# Altium PCB PCB (STM32F103C8T6).PcbDoc
Units mm, origin at the board's own origin, x right, y up, seen from the top; angles counter-clockwise.
Board outline 50 x 50 mm, 2 copper layers (Top Layer, Bottom Layer); 42 components, 36 nets, 156 pads, 0 vias.
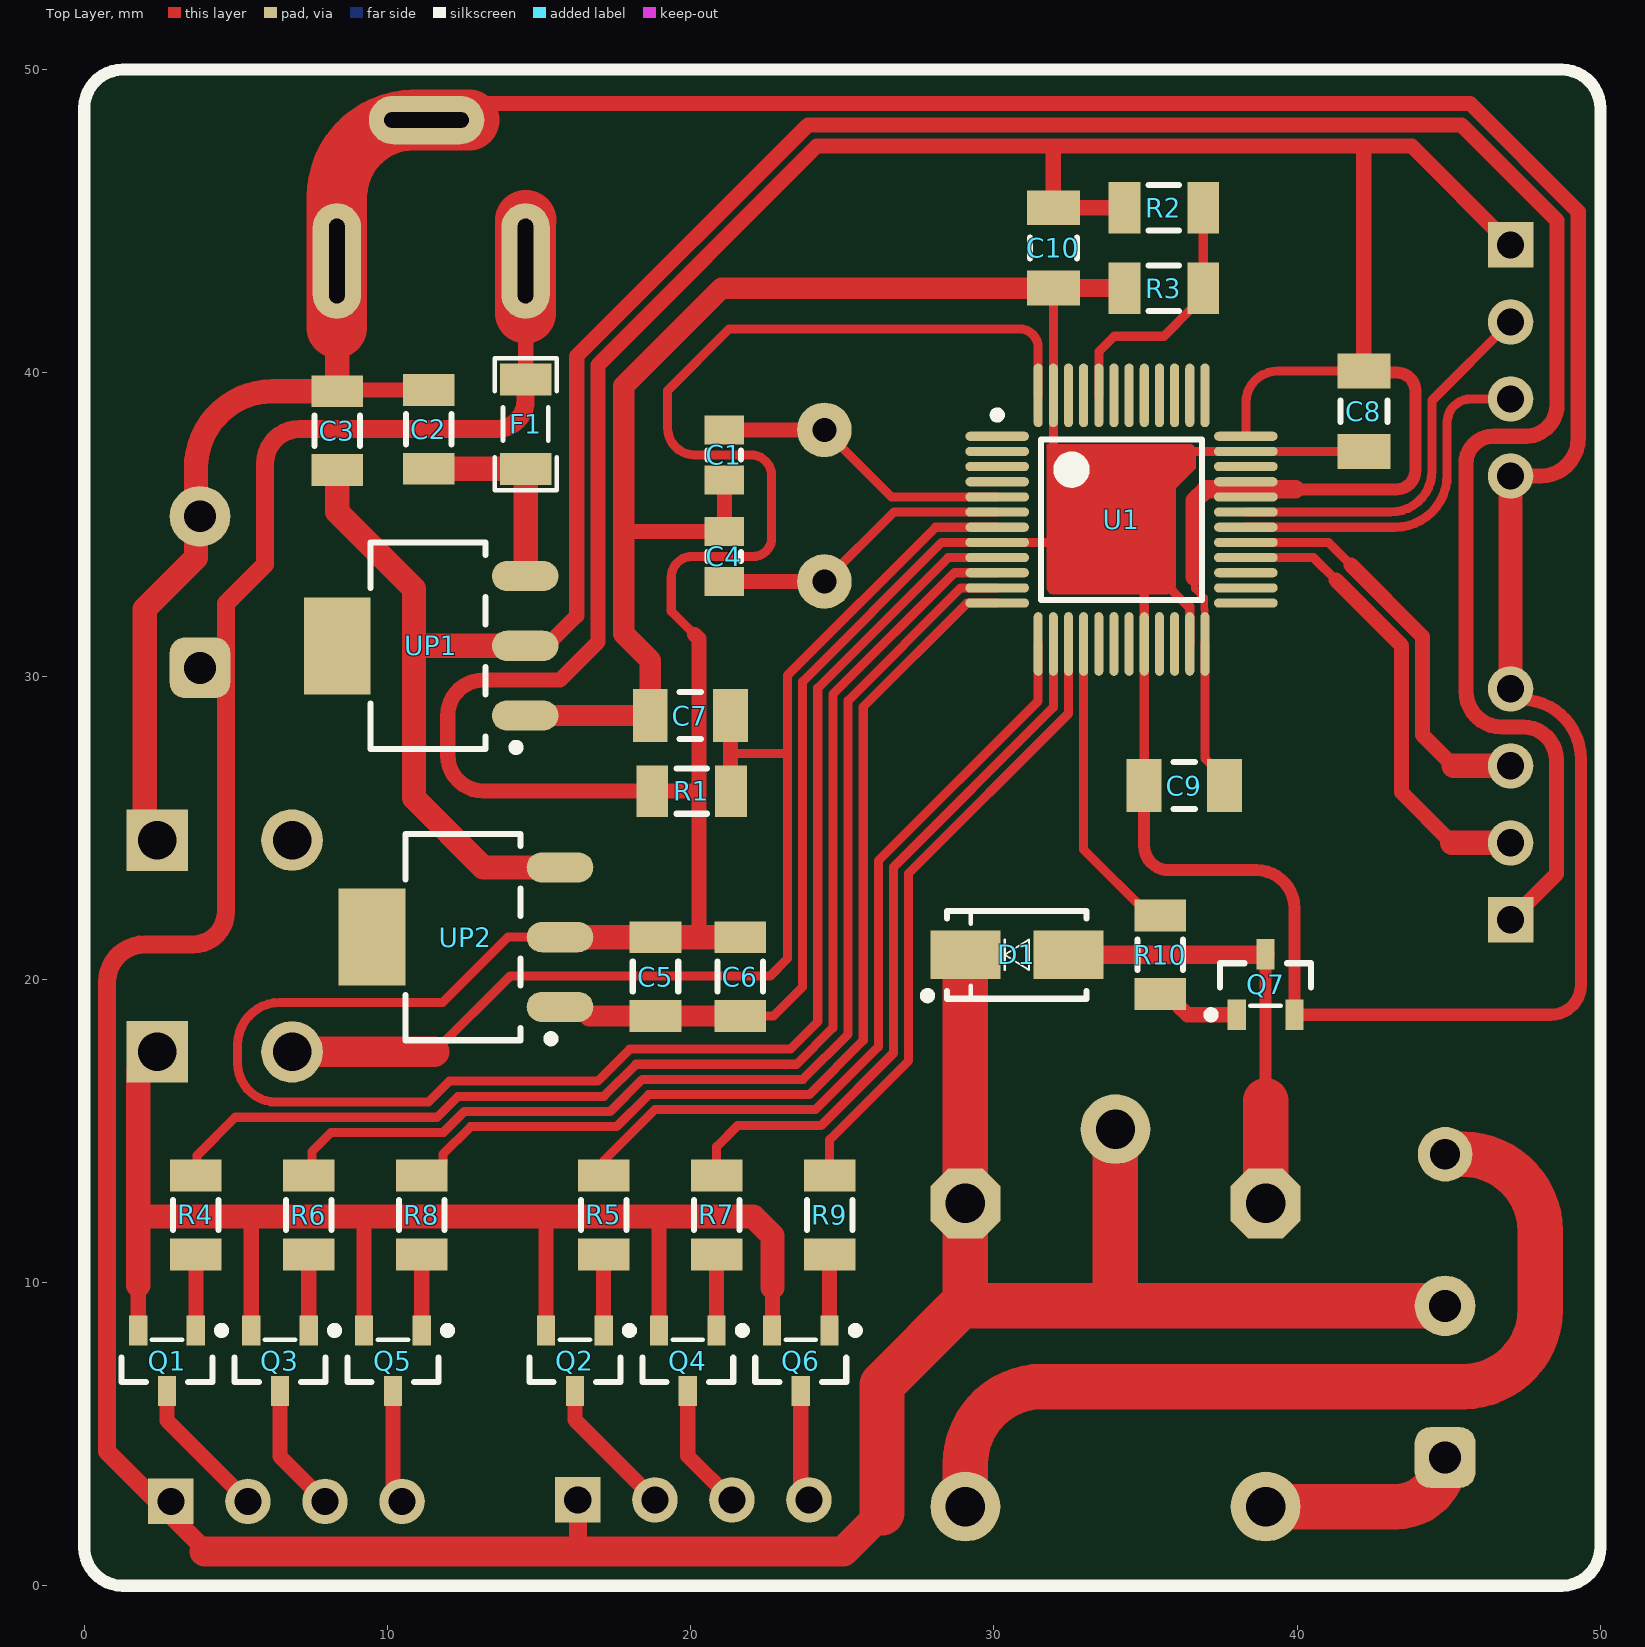
[diagram p0: Top Layer view]
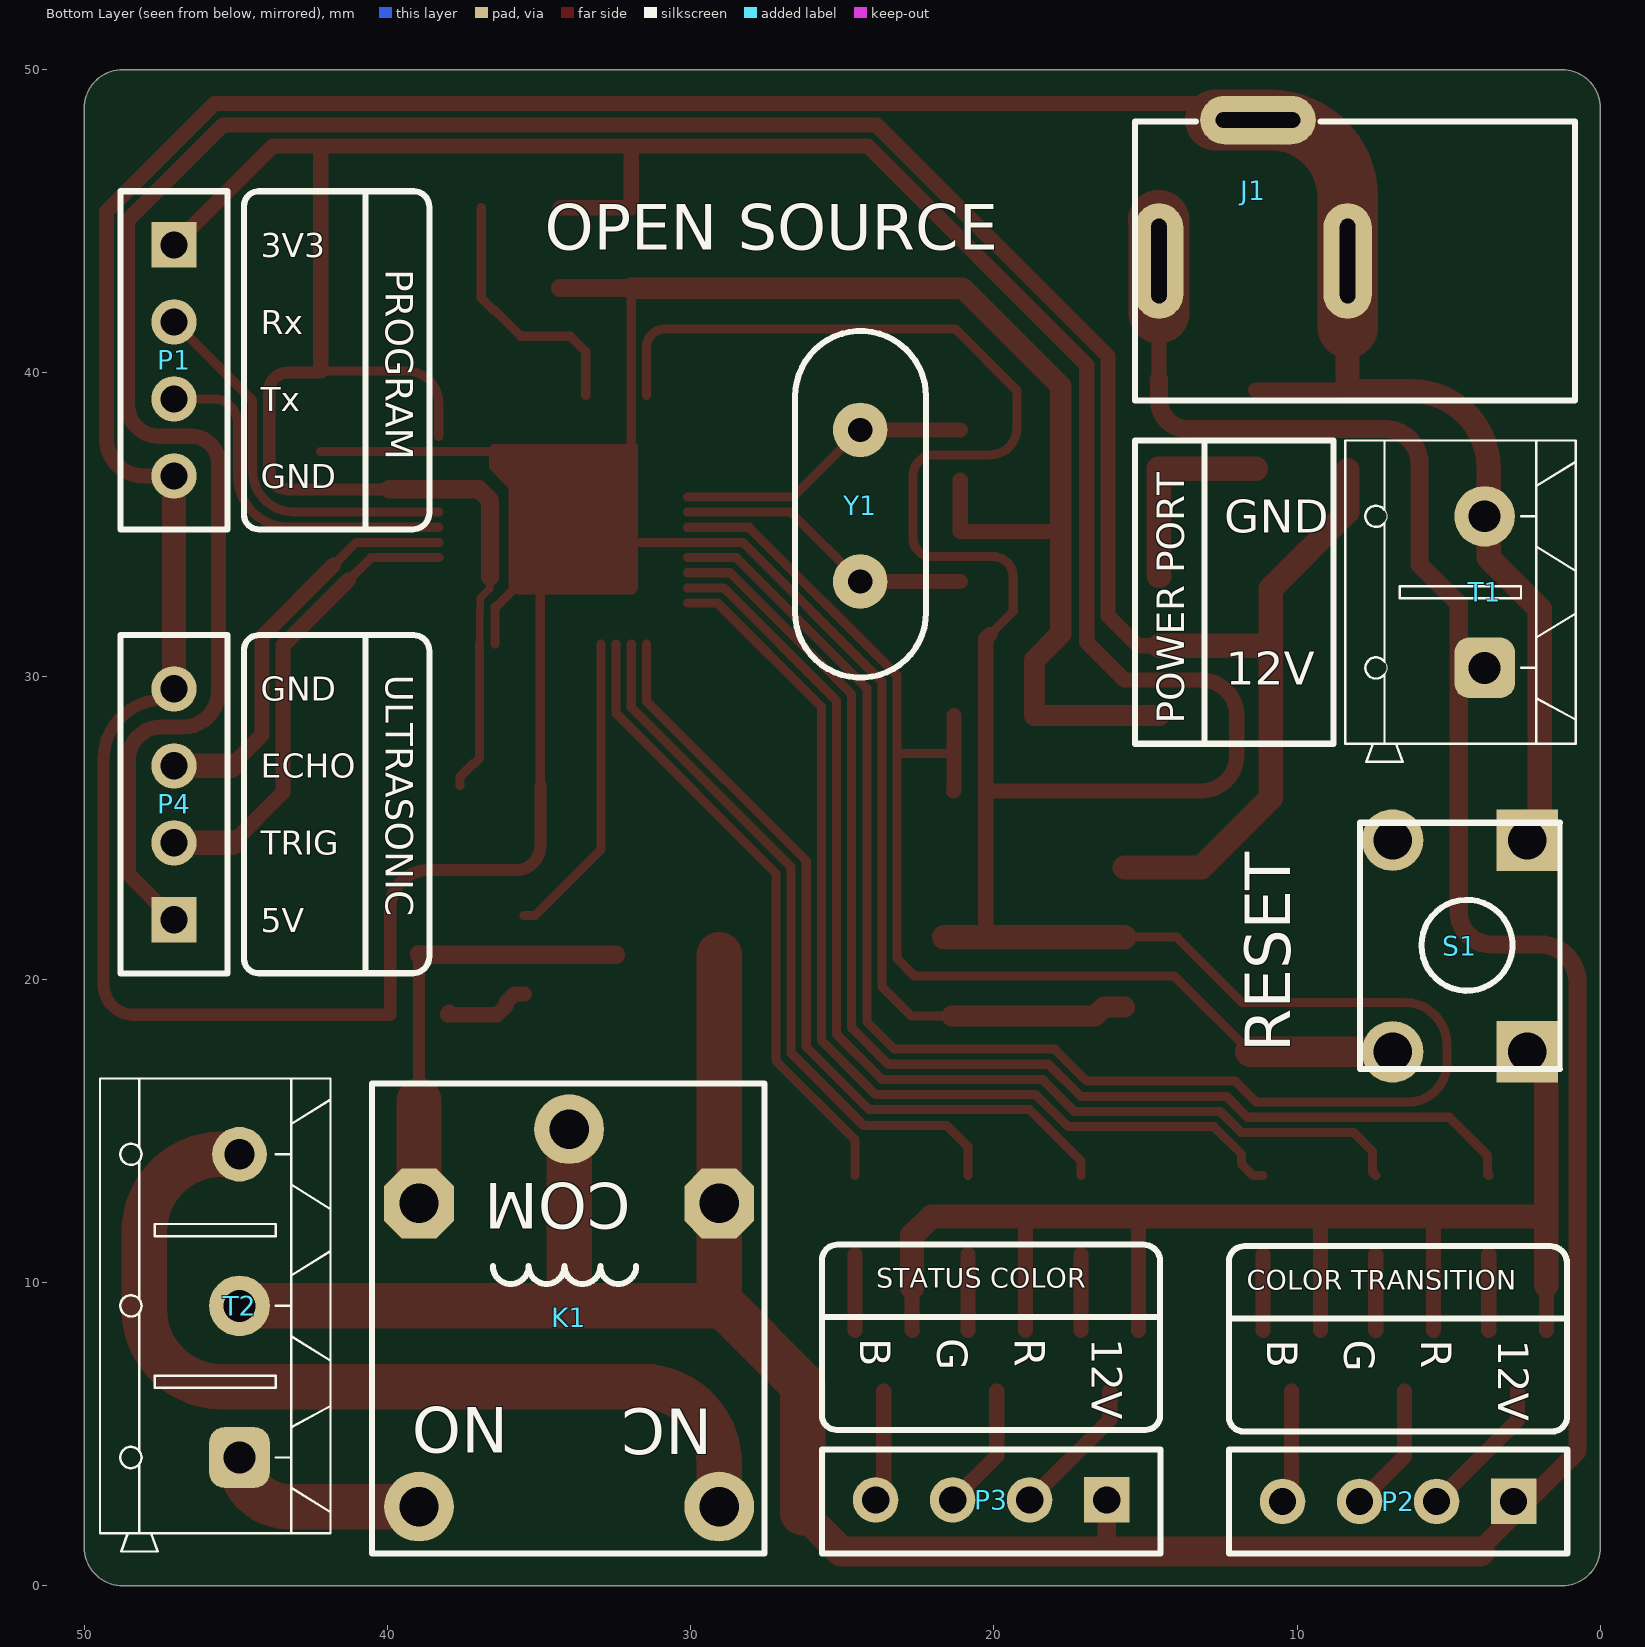
[diagram p1: Bottom Layer view, seen from below]
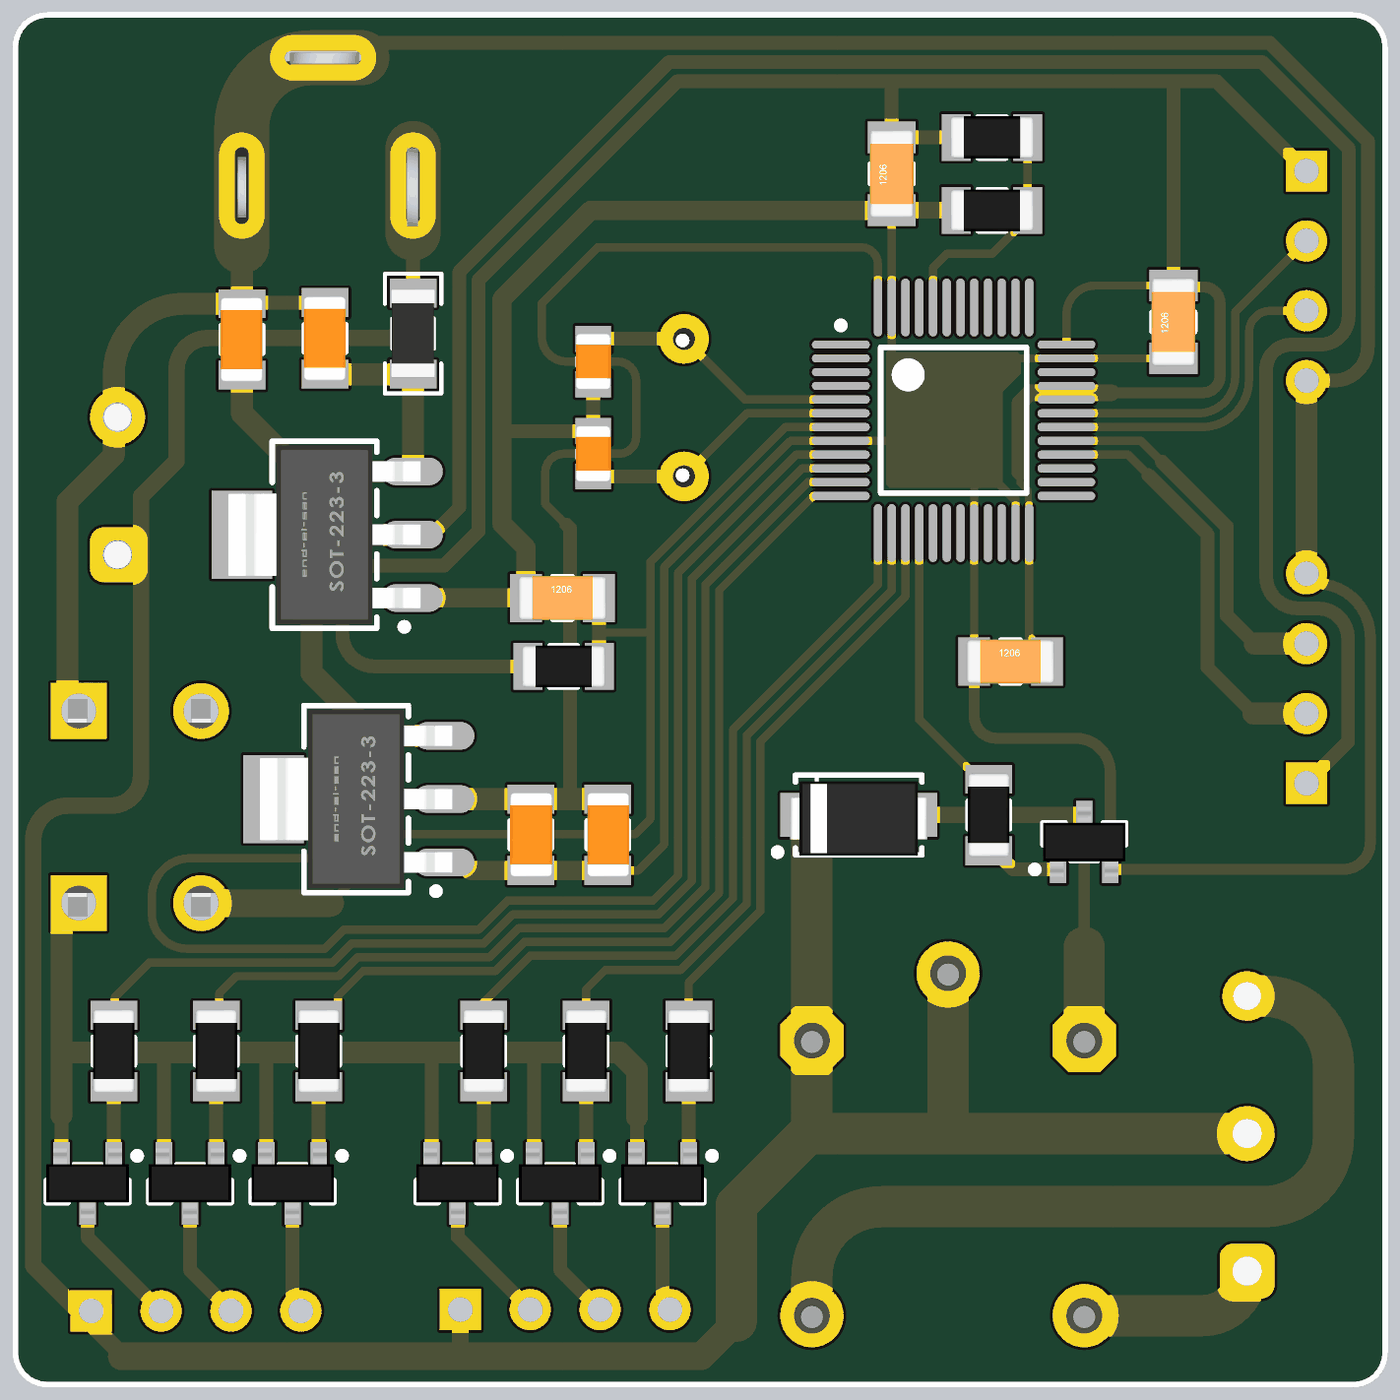
[diagram p2: 3D render of the assembled board from above, using the file's embedded part models]
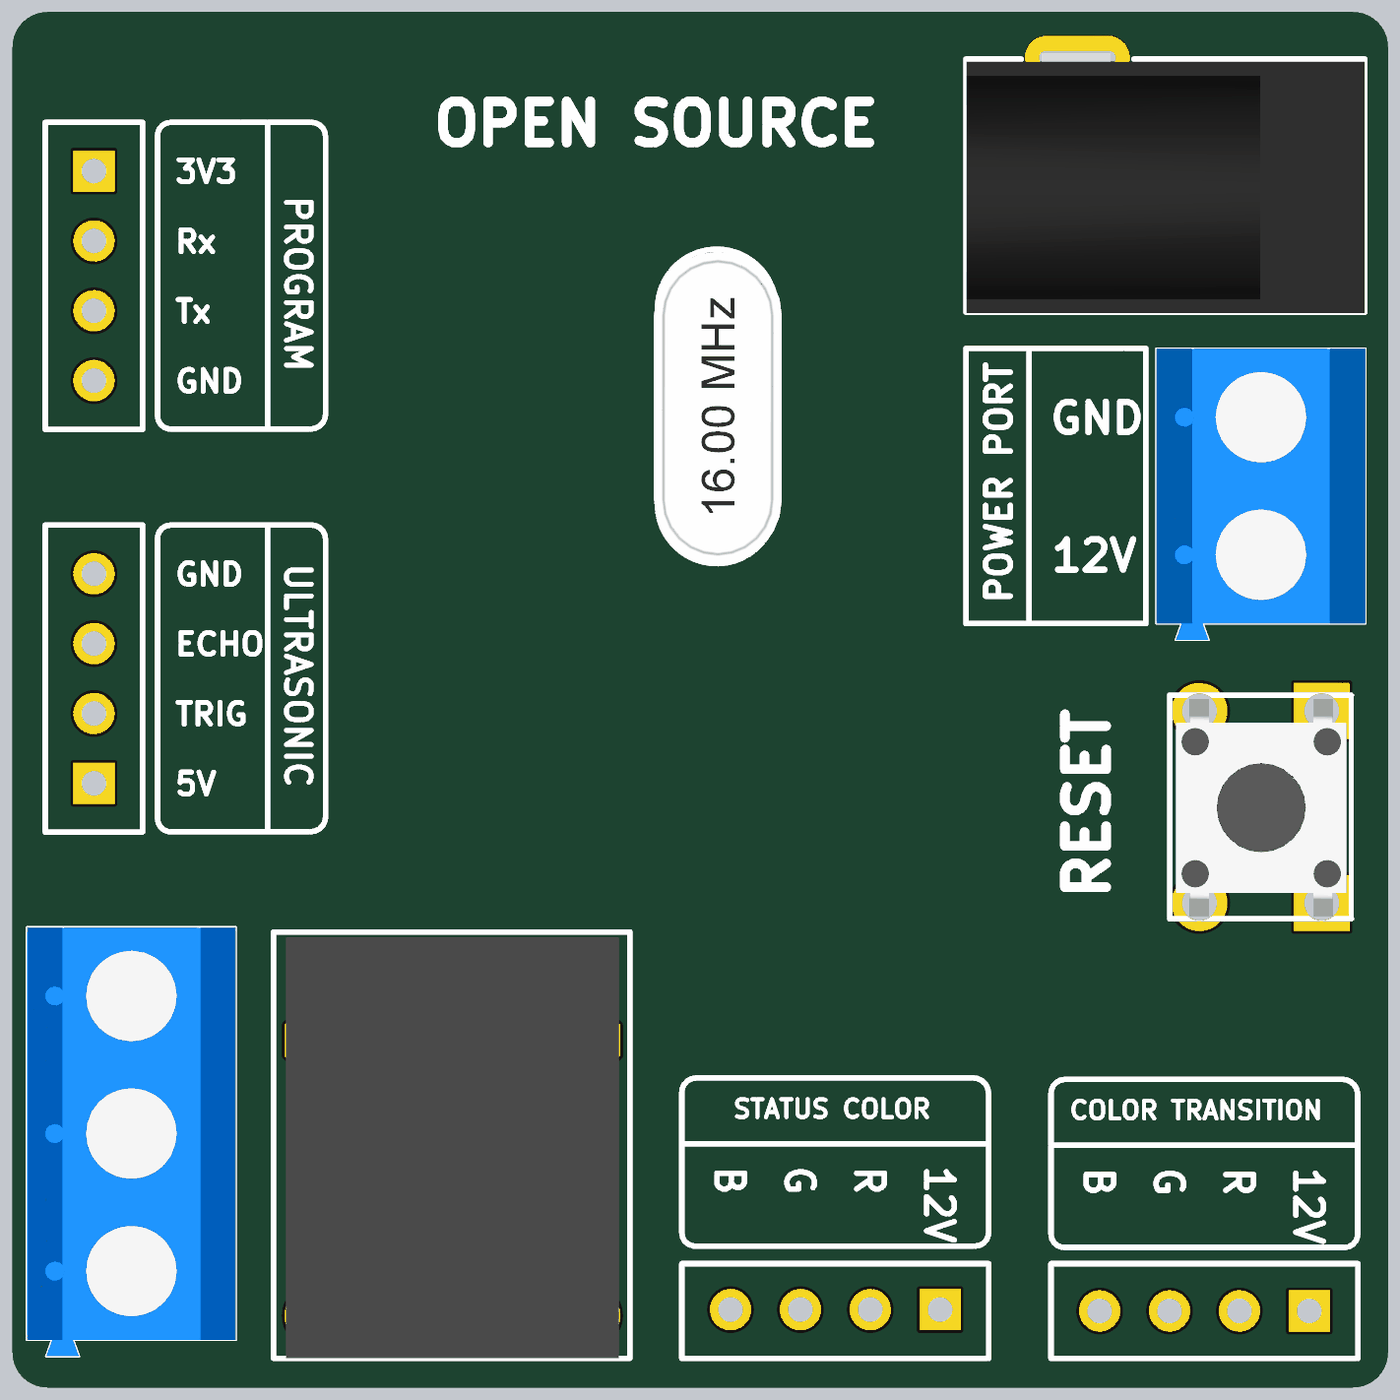
[diagram p3: 3D render of the assembled board from below, using the file's embedded part models]

## Layer stack, top to bottom
Top Solder: solder mask 0.0102, Solder Resist, Dk 3.5
Top Layer: signal copper 0.0356
Dielectric 1: dielectric 0.32, FR-4, Dk 4.8
Bottom Layer: signal copper 0.0356
Bottom Solder: solder mask 0.0102, Solder Resist, Dk 3.5

## Board outline
0,1.27 ccw(c1.27,1.27) 1.27,0 48.73,0 ccw(c48.73,1.27) 50,1.27 50,48.73 ccw(c48.73,48.73) 48.73,50 1.27,50 ccw(c1.27,48.73) 0,48.73

## Design rules (kind name [scope] priority, off if disabled: settings)
AssemblyTestPointUsage [All] p1 off:
AssemblyTestpoint [All] p1 off: testpointundercomponent=TRUE minsize=1.016 maxsize=2.54 preferedsize=1.524 minholesize=0 maxholesize=1.016 preferedholesize=0.813 testpointgrid=0.025 usegrid=TRUE gridtolerance=0 allowsidetop=TRUE allowsidebottom=TRUE
Clearance [All] p1: gap=0.254 ignorepadtopadclearanceinfootprint=FALSE except(0: Arc-Hole Track-Hole SMDPad-Hole THPad-Hole Via-Hole Fill-Hole Poly-Hole Region-Hole Text-Hole; 0.2: Arc-Arc Arc-Track Arc-SMDPad Arc-THPad Track-Track Track-SMDPad Track-THPad SMDPad-SMDPad SMDPad-THPad THPad-THPad)
FabricationTestPointUsage [All] p1 off: valid=0 allowmultiple=FALSE
FabricationTestpoint [All] p1 off: side=3 testpointundercomponent=TRUE minsize=1.016 maxsize=2.54 preferedsize=1.524 minholesize=0 maxholesize=1.016 preferedholesize=0.813 testpointgrid=0.025 allowsidetop=TRUE allowsidebottom=TRUE usegrid=TRUE gridtolerance=0
HoleSize [All] p1: absolutevalues=TRUE maxlimit=5 minlimit=0.025 maxpercent=80.000 minpercent=20.000
MinimumSolderMaskSliver [All] p1: minsoldermaskwidth=0.1
PolygonConnect [All] p1: connectstyle=Relief reliefconductorwidth=0.254 reliefentries=4 polygonreliefangle="90 Angle" airgapwidth=0.254
RoutingCorners [All] p1: cornerstyle=45-Degree minsetback=3 maxsetback=5
RoutingLayers [All] p1: top layer_v5=TRUE bottom layer_v5=FALSE
RoutingVias [All] p1: holewidth=1 width=1.5 viastyle="Through Hole" minholewidth=0.5 minwidth=1 maxholewidth=0.7 maxwidth=1.2
SilkToSilkClearance [All] p1: silktosilkclearance=0.1
SilkToSolderMaskClearance [IsPad] p1: minsilkscreentomaskgap=0 clearancetoexposedcopper=TRUE
SolderMaskExpansion [All] p1: expansion=0.102
Width [All] p1: maxlimit=3 minlimit=0.2 preferedwidth=0.5
20 further rules are at their usual default settings.

## Components (designator, comment, footprint, x,y, rotation, side; value= is the part's Value field where it differs from the comment)
C1 "18pF" CAP805 21.11,38.12 r270 top
C2 "10uF" Cap1206_(3216X15) 11.363,39.436 r270 top
C3 "10uF" Cap1206_(3216X15) 8.34,39.396 r270 top
C4 "18pF" CAP805 21.11,33.12 r90 top
C5 "10uF" Cap1206_(3216X15) 18.84,18.794 r90 top
C6 "100nF" Cap1206_(3216X15) 21.64,18.794 r90 top
C7 "100nF" Cap1206_(3216X15L) 19.99,28.7 r0 top
C8 "100nF" Cap1206_(3216X15L) 42.2,38.735 r90 top
C9 "100nF" Cap1206_(3216X15L) 36.28,26.39 r0 top
C10 "100nF" Cap1206_(3216X15L) 31.96,44.12 r90 top
D1 "1n4007" DIOM4629X24N 30.76,20.81 r180 top
F1 "Ferrite Bead SMD" FB1206 14.56,38.31 r90 top
J1 "Power Jack" "DC Power Jack" 14.554,43.69 r0 bottom
K1 "Standard Relay" "BABY Milon Relay (15.40x12.10x13.10)" 34.01,15.06 r0 bottom
P1 "Program CN" HDR1X4 47.04,44.22 r270 bottom
P2 "Show LED CN" HDR1X4 2.86,2.78 r0 bottom
P3 "Status LED CN" HDR1X4 16.28,2.83 r0 bottom
P4 "Ultrasonic CN" HDR1X4 47.04,21.96 r90 bottom
Q1 "BC846" SOT23_L 2.73,7.42 r270 top
Q2 "BC846" SOT23_L 16.18,7.42 r270 top
Q3 "BC846" SOT23_L 6.455,7.42 r270 top
Q4 "BC846" SOT23_L 19.905,7.42 r270 top
Q5 "BC846" SOT23_L 10.18,7.42 r270 top
Q6 "BC846" SOT23_L 23.63,7.42 r270 top
Q7 "BC846" SOT23_L 38.96,19.83 r90 top
R1 "10K" "RES1206 _(3216X08L)" 21.33,26.21 r180 top
R2 "10K" "RES1206 _(3216X08L)" 36.906,45.445 r180 top
R3 "10K" "RES1206 _(3216X08L)" 34.31,42.795 r0 top
R4 "330R" "RES1206 _(3216X08L)" 3.68,13.526 r270 top
R5 "330R" "RES1206 _(3216X08L)" 17.13,13.526 r270 top
R6 "330R" "RES1206 _(3216X08L)" 7.405,13.526 r270 top
R7 "330R" "RES1206 _(3216X08L)" 20.855,13.526 r270 top
R8 "330R" "RES1206 _(3216X08L)" 11.13,13.526 r270 top
R9 "330R" "RES1206 _(3216X08L)" 24.58,13.526 r270 top
R10 "330R" "RES1206 _(3216X08L)" 35.49,22.108 r270 top
S1 "Switch PB" "Switch - Push to On" 4.63,21.1 r270 bottom
T1 "Power" "KF301 2PIN" 3.817,32.77 r90 bottom
T2 "KF301_Terminal" "KF301 3PIN" 44.88,9.23 r90 bottom
U1 "STM32F103C8T6" STM-LQFP48_M 34.21,35.16 r0 top
UP1 "AMS1117" SOT223 11.34,31 r180 top
UP2 "AMS1117" SOT223 12.49,21.39 r180 top
Y1 "12 MHz" "XTAL 16MHZ" 24.41,35.62 r90 bottom

## Footprints (in the part's own frame and the unit in brackets; to place one, negate y for a bottom-side part, rotate by r counter-clockwise, add the part's x,y. Pads: shape width x height; smd on the part's side, far side on the other; paste and mask are expansions set on the pad)
"BABY Milon Relay (15.40x12.10x13.10)" [mm]
  round 2.3 hole 1.3: 1(0,0) 2(-4.95,12.45) 3(4.95,12.45)
  oct 2.3x2.3 hole 1.3: 4(-4.95,2.45) 5(4.95,2.45)
  silkscreen extent -6.45,-1.5 6.5,14, body extent -6.05,-1.3 6.05,14, height 16.1
CAP805 [mm]
  rect 0.95x1.3 smd: 1(0,0) 2(1.65,0)
  silkscreen extent 0.67,-0.55 0.97,0.55, body extent -0.19,-0.63 1.84,0.63, height 0.65
Cap1206_(3216X15) [mm]
  rect 1.05x1.7 smd: 1(0,0) 2(2.596,0)
  silkscreen extent 0.8,-0.75 1.8,0.75, body extent -0.22,-0.77 2.82,0.75, height 0.75
Cap1206_(3216X15L) [mm] "Chip Capacitor, 2-Leads, Body 3.2x1.6mm, IPC High Density"
  rect 1.15x1.75 smd: 1(-1.325,0) 2(1.325,0)
  silkscreen extent -0.35,-0.77 0.35,0.77, body extent -1.6,-0.8 1.6,0.8, height 1
"DC Power Jack" [mm]
  oval 1.6x3.81 hole 0.508 slot 2.794 at 90 deg mask+0.025: 1(0,0) 2(-6.222,0)
  oval 3.81x1.6 hole 0.508 slot 2.794 at 0 deg mask+0.025: 3(-3.264,-4.65)
  silkscreen extent -13.71,-4.6 0.79,4.6, body extent -13.71,-4.84 0.77,4.64, height 2.9
DIOM4629X24N [mm] "Molded Diode, 2-Leads, Body 4/60x2/90mm, IPC Medium Density-Design:Abbas Basereh"
  rect 2.3x1.6 smd: 1(-1.7,0) 2(1.7,0)
  silkscreen extent -2.3,-1.45 3.07,1.47, body extent -2.5,-1.22 2.5,1.48, height 2.2
FB1206 [mm] "Ferrite Chip Bead SMD 1206-Design:Ali Hafizi"
  rect 1.05x1.7 smd: 1(-1.475,0) 2(1.475,0)
  silkscreen extent -2.17,-1.02 2.18,1.02, body extent -1.59,-0.8 1.61,0.8, height 1.1
HDR1X4 [mm] "Connector; Header; 4 Position"
  rect 1.5x1.5 hole 0.9: 1(0,0)
  round 1.5 hole 0.9: 2(2.54,0) 3(5.08,0) 4(7.62,0)
  silkscreen extent -1.77,-1.77 9.39,1.77
"KF301 2PIN" [mm] "Designer Abbas Basereh"
  rrect50% 2x2 hole 1.05: 1(-2.5,0)
  round 2 hole 1.05: 2(2.5,0)
  silkscreen extent -5.6,-3 5,4.6, body extent -5.6,-3 5,4.6, height 10
"KF301 3PIN" [mm] "Designer Abbas Basereh"
  rrect50% 2x2 hole 1.05: 1(-5,0)
  round 2 hole 1.05: 2(0,0)
  round 1.8 hole 1: 3(5,0)
  silkscreen extent -8.1,-3 7.5,4.6, body extent -8.1,-3 7.5,4.6, height 10
"RES1206 _(3216X08L)" [mm] "Chip Resistor, 2-Leads, Body 3.2x1.6mm, IPC High Density _ (0.125 W)"
  rect 1.05x1.7 smd: 1(0,0) 2(2.596,0)
  silkscreen extent 0.8,-0.75 1.8,0.75, body extent -0.23,-0.76 2.82,0.76, height 0.6
SOT23_L [mm] "SOT23, 3-Leads, Body 2.9x1.3mm, Pitch 0.95mm, Lead Span 2.3mm, IPC High Density"
  rect 1x0.6 smd: 1(-1,0.95) 2(-1,-0.95) 3(1,0)
  silkscreen extent -1.12,-1.5 0.7,1.93, body extent -1.27,-1.5 1.27,1.5, height 1.1
SOT223 [mm] "SOT223, 4-Leads, Body 6.5x3.5mm, Pitch 2.30mm-Designer"
  oval 2.2x1 smd: 1(-3.2,2.3) 2(-3.2,0) 3(-3.2,-2.3)
  rect 2.2x3.2 smd: 4(3,0)
  Top Layer pour cut-out: -1.7,3.556 1.7,3.556 1.7,-3.556 -1.7,-3.556
  silkscreen extent -3.03,-3.4 1.9,3.47, body extent -3.5,-3.25 3.5,3.25, height 1.7
STM-LQFP48_M [mm] "QFP, 48-Leads, Body 7x7mm, Pitch 0.5mm, IPC Low Density"
  oval 2.1x0.3 smd: 1(-4.1,2.75) 2(-4.1,2.25) 3(-4.1,1.75) 4(-4.1,1.25) 5(-4.1,0.75) 6(-4.1,0.25) 7(-4.1,-0.25) 8(-4.1,-0.75) 9(-4.1,-1.25) 10(-4.1,-1.75) 11(-4.1,-2.25) 12(-4.1,-2.75) 25(4.1,-2.75) 26(4.1,-2.25) 27(4.1,-1.75) 28(4.1,-1.25) 29(4.1,-0.75) 30(4.1,-0.25) 31(4.1,0.25) 32(4.1,0.75) 33(4.1,1.25) 34(4.1,1.75) 35(4.1,2.25) 36(4.1,2.75)
  oval 0.3x2.1 smd: 13(-2.75,-4.1) 14(-2.25,-4.1) 15(-1.75,-4.1) 16(-1.25,-4.1) 17(-0.75,-4.1) 18(-0.25,-4.1) 19(0.25,-4.1) 20(0.75,-4.1) 21(1.25,-4.1) 22(1.75,-4.1) 23(2.25,-4.1) 24(2.75,-4.1) 37(2.75,4.1) 38(2.25,4.1) 39(1.75,4.1) 40(1.25,4.1) 41(0.75,4.1) 42(0.25,4.1) 43(-0.25,4.1) 44(-0.75,4.1) 45(-1.25,4.1) 46(-1.75,4.1) 47(-2.25,4.1) 48(-2.75,4.1)
  silkscreen extent -4.22,-2.65 2.65,3.57, body extent -3.5,-3.5 3.5,3.5, height 1.6
"Switch - Push to On" [mil]
  rect 80x80 hole 50: 1(-137.5,87.5) 1(137.5,87.5)
  round 80 hole 50: 2(-137.5,-87.5) 2(137.5,-87.5)
  silkscreen extent -160,-130 160,130, body extent -155,-121 157,123, height 205
"XTAL 16MHZ" [mm] "Crystal Oscillator"
  round 1.8 hole 0.8: 1(-2.5,0) 2(2.5,0)
  silkscreen extent -5.67,-2.18 5.76,2.15, body extent -5.68,-2.38 5.67,2.27, height 0.99

## Part data
C1 C2 C3 C4 C5 C6 C7 C8 C9 C10: library part "CAP SMD PACKAGE", "TOTAL CAPACITOR SMD PACK", Data=2017-3-10, Desc.="CAP SMD TOTAL PACKAGES"
  C1 C4 C6 C7 C8 C9 C10: Designer="Majid Derhambakhsh"
  C2 C3 C5: Designer="Abbas Basereh"
D1: library part "1n4007 SMD M7", "Standard Rectifiers", Manufacturer="DC COMPONENTS", Data=16-12-2016, Designer="Abbas Basereh", Link=http://www.tme.eu/en/details/m7/smd-universal-diodes/dc-components/, Part. No=M7
F1: library part "Ferrite Bead SMD Package", Designer="Ali Hafizi"
J1: library part "DC Power Jack", Designer="Majid Derhambakhsh"
K1: library part Relay, "Relay SPDT POWER NEEDLE", Company=E.P.I.L, Design_Date=2011/10/31, Designer="Ali Hafizi"
P1 P2 P3 P4: library part "Header 4", "Header, 4-Pin", LatestRevisionDate=17-Jul-2002, LatestRevisionNote="Re-released for DXP Platform.", Publisher="Altium Limited"
Q1 Q2 Q3 Q4 Q5 Q6 Q7: "NPN General-purpose Transistor", ComponentLink1Description="Manufacturer Link", ComponentLink1URL=http://www.semiconductors.philips.com/, ComponentLink2Description=Datasheet, ComponentLink2URL=http://www.semiconductors.philips.com/acrobat/datasheets/BC846_BC847_BC848_5.pdf, DatasheetVersion=4-Feb-2002, LatestRevisionDate=12-Dec-2006, LatestRevisionNote="IPC-7351 Footprint Added.", PackageDescription="3-Pin SOT-23 Package 0.95 mm Pitch, 2.3 mm Lead Span", PackageReference=SOT23, PackageVersion=2017-1-6, Published=2017-1-6, Publisher="Abbas Basereh"
R1 R2 R3 R4 R5 R6 R7 R8 R9 R10: library part "RES SMD PACKAGE", "TOTAL SMD RESISTOR PACK", Data=2017-3-10, Desc.="RES SMD PAKAGES", Designer="Abbas Basereh"
S1: "Push Button Switch"
T1: library part KF301-2Pin_Terminal, "Terminal 2 Pin 250VAC 16A", Designer="Abbas Basereh", Link=https://www.aliexpress.com/item/, Part. No="KF301 2P"
T2: library part KF301-3Pin_Terminal, "Terminal 3 Pin 250VAC 16A", Designer="Abbas Basereh", Link=https://www.aliexpress.com/item/, Part. No="KF301 3P"
U1: "ARM Cortex-M3 32-bit MCU, 64 KB Flash, 20 KB Internal RAM, 37 I/Os, 48-pin LQFP, -40 to 85 degC, Tray", I/Os (High Current)=37, Operating Frequency(F) (Processor speed) (MHz)=72, Supplier Part Number 1=497-6063-ND, Supply Voltage(Vcc) min (V)=2, A/D Converter="2x12-bit (10 Channel)", ComponentLink1Description="Manufacturer URL", ComponentLink1URL=http://www.st.com/web/en/home.html, ComponentLink2Description=Datasheet, ComponentLink2URL=http://www.st.com/st-web-ui/static/active/en/resource/technical/document/datasheet/CD00161566.pdf, ComponentLink3Description="Package Specification", ComponentLink3URL=http://www.st.com/st-web-ui/static/active/en/resource/technical/document/datasheet/DM00058181.pdf, Core="ARM Cortex-M3", DatasheetVersion="Rev. 16", FLASH Size (Prog) (kB)=64, Internal RAM Size (kB)=20, Mounting Technology="Surface Mount", PackageDescription="48-Pin Low Profile Quad Flat Package, 7 x 7 mm Body, 0.5 mm Pitch", PackageReference=LQFP48, PackageVersion="Rev. 6, 06/2013", Packing=Tray, PartNumber=STM32F103C8T6, Supplier 1=Digi-Key, Supplier 2=Farnell, Supplier 3=Newark, Supplier 4=Newark, Supplier 5=Mouser, Supplier Part Number 2=1447637, Supplier Part Number 3=59M2182, Supplier Part Number 4=57P1222, Supplier Part Number 5=511-STM32F103C8T6
UP1 UP2: "x.x Volt, 800mA Low-Dropout Linear Regulator, 4-pin SOT-223", Data=16-12-2016, Designer="Ali Hafizi"
Y1: library part XTAL, "XTAL Crystal", ComponentLink1Description=Datasheet, ComponentLink2Description=Reference, Design Date=2017-1-3, Designer="ABBAS BASEREH", Mounting Technology="Surface Mount\Through-Hole", Status=Unreleased

## Nets (pads, with @x,y where several pads share a name; then routed paths per layer and width w, separated by ;. In a path a pad name is that pad's centre, name@x,y a point inside that pad or via, vN(x,y) a via of type N, cw(c..) or ccw(c..) an arc to the next point about the centre after c; other vN are vias at no path point)
3v3: C5.2 C6.2 C8.2 C9.2 C10.2 P1.1 R1.2 R2.2 U1.9 U1.24 U1.32 U1.33 U1.36 U1.48 UP2.2 | length 197.2
  Top Layer w0.25: 36.62,33.28 36.62,32.89 36.935,32.575 36.935,32.213 36.953,32.195 36.953,31.067 U1.24
  Top Layer w0.3: UP2.2 13.97,21.39 11.82,19.24 6.46,19.24 ccw(c6.46,17.84) 5.06,17.84 5.06,17.23 ccw(c6.34,17.23) 6.34,15.95 11.35,15.95 12.04,16.64 16.932,16.64 17.992,17.7 23.284,17.7 24.19,18.606 24.19,29.606 28.494,33.91 U1.9 ; 20.13,31.37 19.36,32.14 19.36,33.26 cw(c20.045,33.26) 20.045,33.945 22.065,33.945 ccw(c22.065,34.55) 22.67,34.55 22.67,36.61 ccw(c21.985,36.61) 21.985,37.295 20.13,37.295 cw(c20.13,38.185) 19.24,38.185 19.24,39.42 21.27,41.45 30.85,41.45 cw(c30.85,40.84) 31.46,40.84 U1.48 ; U1.24 36.96,27.291 37.136,27.115 37.18,27.115 37.605,26.69 C9.2 ; U1.36 38.31,39.01 cw(c39.36,39.01) 39.36,40.06 C8.2
  Top Layer w0.4: 39.95,36.16 43.28,36.16 ccw(c43.28,36.78) 43.9,36.78 43.9,39.41 ccw(c43.3,39.41) 43.3,40.01 42.25,40.01 C8.2
  Top Layer w0.5: 20.13,31.37 20.27,31.23 20.27,26.22 ; 20.27,21.39 20.27,26.22 ; R2.2 C10.2 31.96,47.43 31.91,47.48 ; C8.2 42.2,47.47 42.21,47.48 ; P1.1 43.78,47.48 42.21,47.48 ; 20.27,26.22 20.26,26.21 R1.2 13.17,26.21 cw(c13.17,27.39) 11.99,27.39 11.99,28.7 cw(c13.16,28.7) 12.033,29.013 cw(c13.16,28.7) 12.847,29.827 cw(c13.16,28.7) 13.16,29.87 15.69,29.87 16.94,31.12 16.94,40.26 24.16,47.48 31.91,47.48 ; 31.91,47.48 42.21,47.48
  Top Layer w0.6: 36.62,33.28 36.62,35.792 36.988,36.16 39.95,36.16
  Top Layer w0.8: UP2.2 C5.2 20.27,21.39 C6.2
5v: C3.2 P4.1 UP1.2 UP2.3 | length 96.6
  Top Layer w0.5: UP1.2 15.25,31 16.24,31.99 16.24,40.55 23.87,48.18 45.42,48.18 48.57,45.03 48.57,38.94 cw(c47.54,38.94) 48.428,38.418 cw(c47.54,38.94) 48.062,38.052 cw(c47.54,38.94) 47.54,37.91 46.47,37.91 ccw(c46.47,37.01) 45.57,37.01 45.57,29.5 ccw(c46.75,29.5) 46.75,28.32 47.461,28.32 cw(c47.461,27.231) 48.55,27.231 48.55,23.47 P4.1
  Top Layer w0.8: C3.2 8.34,35.41 10.872,32.878 10.872,31 ; UP1.2 10.872,31 ; UP2.3 13.16,23.69 10.872,25.978 10.872,31
BOOT0: R2.1 R3.2 U1.44 | length 8.6
  Top Layer w0.3: U1.44 33.46,40.7 33.97,41.21 35.61,41.21 36.495,42.095 36.531,42.095 36.906,42.47 R3.2 R2.1
GND: C1.2 C2.1 C3.1 C4.2 C5.1 C6.1 C7.1 C8.1 C9.1 C10.1 J1.2 J1.3 P1.4 P4.4 Q1.2 Q2.2 Q3.2 Q4.2 Q5.2 Q6.2 Q7.2 R3.1 S1.1 T1.2 U1.8 U1.20 U1.23 U1.35 U1.47 UP1.1 UP2.1 | length 259.1
  Top Layer w0.3: C6.1@21.38,18.794 C6.1 22.734,18.794 23.69,19.75 23.69,29.813 28.287,34.41 U1.8 32.03,34.41 32.03,34.52 ; 31.96,37.53 U1.47 C10.1 ; C9.1@34.96,26.39 U1.20 34.96,32.92 35.02,32.92 ; 35.91,32.8 35.88,32.83 35.88,32.82 36.41,32.29 36.46,32.29 U1.23 ; 35.92,37.41 U1.35 C8.1
  Top Layer w0.4: C9.1 34.955,24.415 ccw(c35.77,24.415) 35.77,23.6 38.66,23.6 cw(c38.66,22.35) 39.91,22.35 Q7.2 48.37,18.83 ccw(c48.37,19.82) 49.36,19.82 49.36,27.26 ccw(c47.396,27.26) 47.396,29.224 cw(c47.396,29.58) P4.4
  Top Layer w0.5: Q1.2 1.78,9.9 ; 5.45,12.18 5.505,12.125 Q3.2 ; C3.1 cw(c8.38,39.396) 8.38,39.436 C2.1 ; Q5.2 9.23,12.18 ; J1.3@12.698,48.34 13.238,48.88 45.71,48.88 49.27,45.32 49.27,37.83 cw(c48.04,37.83) 48.04,36.6 P1.4 ; Q2.2 15.23,12.18 ; 17.825,34.77 C4.2 C1.2 ; Q4.2 18.955,12.18 ; Q6.2 22.7,8.44 22.7,9.84
  Top Layer w0.6: C10.1 R3.1
  Top Layer w0.7: UP1.1 C7.1 18.665,30.525 17.795,31.395 17.795,39.565 21.025,42.795 C10.1 ; UP2.1 16.371,19.09 16.667,18.794 C5.1 C6.1@21.38,18.794
  Top Layer w0.8: 1.78,9.9 1.78,12.18 ; S1.1@2.408,17.608 1.792,16.992 1.792,16.534 1.78,16.523 1.78,12.18 ; S1.1@2.408,24.593 1.997,25.003 1.997,32.21 3.682,33.894 3.682,36.856 cw(c6.222,36.856) 6.222,39.396 C3.1 8.34,41.482 8.332,41.49 ; 22.7,9.84 22.7,11.54 22.06,12.18 18.955,12.18 15.23,12.18 9.23,12.18 5.45,12.18 1.78,12.18 ; P4.4 P1.4
  Top Layer w2: 8.332,41.49 J1.2 8.332,45.8 cw(c10.872,45.8) 10.872,48.34 J1.3 J1.3@12.698,48.34
MCU_XI: C1.1 U1.5 Y1.2 | length 9.9
  Top Layer w0.3: Y1.2 26.62,35.91 U1.5
  Top Layer w0.5: C1.1 Y1.2
MCU_XO: C4.1 U1.6 Y1.1 | length 9.9
  Top Layer w0.3: Y1.1 26.7,35.41 U1.6
  Top Layer w0.5: C4.1 Y1.1
NetC2_2: C2.2 F1.1 UP1.3 | length 6.7
  Top Layer w0.8: C2.2 11.363,36.835 F1.1 14.56,33.32 cw(c14.54,33.32) UP1.3
NetD1_1: D1.1 K1.5 Q7.3 | length 14.7
  Top Layer w0.4: 38.96,16 Q7.3@38.96,20.81
  Top Layer w0.6: D1.1 38.96,20.81 Q7.3
  Top Layer w1.5: K1.5 38.96,16
NetK1_2: K1.2 T2.3 | length 30.4
  Top Layer w1.5: K1.2 29.06,4.03 cw(c31.6,4.03) 31.6,6.57 45.48,6.57 ccw(c45.48,9.11) 46.543,6.803 ccw(c45.48,9.11) 47.787,8.047 ccw(c45.48,9.11) 48.02,9.11 48.02,11.69 ccw(c45.48,11.69) 47.795,12.735 ccw(c45.48,11.69) 46.525,14.005 ccw(c45.48,11.69) 45.48,14.23 T2.3
NetK1_3: K1.3 T2.1 | length 6.8
  Top Layer w1.5: K1.3 43.26,2.61 ccw(c43.26,4.23) T2.1
NetP2_2: P2.2 Q1.3 | length 4.7
  Top Layer w0.5: Q1.3 2.73,5.45 P2.2
NetP2_3: P2.3 Q3.3 | length 4.3
  Top Layer w0.5: Q3.3 6.455,4.265 P2.3
NetP2_4: P2.4 Q5.3 | length 3.8
  Top Layer w0.5: Q5.3 10.18,3.351 10.48,3.051 P2.4
NetP3_2: P3.2 Q2.3 | length 4.7
  Top Layer w0.5: Q2.3 16.18,5.47 P3.2
NetP3_3: P3.3 Q4.3 | length 4.2
  Top Layer w0.5: Q4.3 19.905,4.285 P3.3
NetP3_4: P3.4 Q6.3 | length 3.7
  Top Layer w0.5: Q6.3 23.63,3.371 23.9,3.101 P3.4
NetQ1_1: Q1.1 R4.2 | length 2.5
  Top Layer w0.5: Q1.1 R4.2
NetQ2_1: Q2.1 R5.2 | length 2.5
  Top Layer w0.5: Q2.1 R5.2
NetQ3_1: Q3.1 R6.2 | length 2.5
  Top Layer w0.5: Q3.1 R6.2
NetQ4_1: Q4.1 R7.2 | length 2.5
  Top Layer w0.5: Q4.1 R7.2
NetQ5_1: Q5.1 R8.2 | length 2.5
  Top Layer w0.5: Q5.1 R8.2
NetQ6_1: Q6.1 R9.2 | length 2.5
  Top Layer w0.5: Q6.1 R9.2
NetQ7_1: Q7.1 R10.2 | length 3
  Top Layer w0.5: R10.2 35.815,19.512 36.09,19.237 36.09,19.123 36.383,18.83 Q7.1 38.01,18.864 Q7.1@37.96,18.914
NRST: C7.2 R1.1 S1.2 U1.7 | length 40.1
  Top Layer w0.3: 11.548,17.608 14.05,20.11 22.62,20.11 23.19,20.68 23.19,30.02 28.08,34.91 U1.7 ; 21.315,27.444 23.054,27.444
  Top Layer w0.5: C7.2 21.315,27.444 21.315,26.225 R1.1
  Top Layer w1: S1.2@6.853,17.608 11.548,17.608
PRXD: P1.2 U1.31 | length 12.9
  Top Layer w0.3: U1.31 43.088,35.41 ccw(c43.088,36.772) 44.45,36.772 44.45,39.09 P1.2
PTXD: P1.3 U1.30 | length 11.9
  Top Layer w0.3: U1.30 43.229,34.91 ccw(c43.229,36.631) 44.95,36.631 44.95,38.37 cw(c45.72,38.37) 45.72,39.14 P1.3
RELAY: R10.1 U1.16 | length 10.2
  Top Layer w0.3: U1.16 32.96,24.28 35.132,22.108 R10.1
SHOW_LED_B: R8.1 U1.12 | length 33.4
  Top Layer w0.3: R8.1 11.455,13.526 11.83,13.901 11.83,14.226 12.744,15.14 17.553,15.14 18.613,16.2 23.906,16.2 25.69,17.984 25.69,28.984 29.116,32.41 U1.12
SHOW_LED_G: R6.1 U1.11 | length 37.6
  Top Layer w0.3: R6.1 7.515,13.636 7.515,14.325 8.14,14.95 11.847,14.95 12.537,15.64 17.346,15.64 18.406,16.7 23.699,16.7 25.19,18.191 25.19,29.192 28.908,32.91 U1.11
SHOW_LED_R: R4.1 U1.10 | length 41.5
  Top Layer w0.3: R4.1 3.72,13.566 3.72,14.19 4.98,15.45 11.64,15.45 12.33,16.14 17.139,16.14 18.199,17.2 23.492,17.2 24.69,18.398 24.69,29.399 28.701,33.41 U1.10
STAT_LED_B: R9.1 U1.15 | length 20.8
  Top Layer w0.3: R9.1 24.58,14.71 27.19,17.32 27.19,23.496 32.46,28.766 U1.15
STAT_LED_G: R7.1 U1.14 | length 23.7
  Top Layer w0.3: R7.1 20.855,14.485 21.55,15.18 24.3,15.18 26.69,17.57 26.69,23.703 31.96,28.973 U1.14
STAT_LED_R: R5.1 U1.13 | length 26.6
  Top Layer w0.3: R5.1 17.13,14.01 18.82,15.7 24.113,15.7 26.19,17.777 26.19,23.91 31.46,29.18 U1.13
USONIC_ECHO: P4.3 U1.29 | length 13.7
  Top Layer w0.3: U1.29 41.03,34.41 41.78,33.66
  Top Layer w0.5: 41.78,33.66 44.14,31.3 44.14,28.06 45.16,27.04
  Top Layer w0.8: 45.16,27.04 P4.3
USONIC_TRIG: P4.2 U1.28 | length 15.5
  Top Layer w0.3: U1.28 40.54,33.91 41.285,33.165
  Top Layer w0.5: 41.285,33.165 43.44,31.01 43.44,26.17 45.11,24.5
  Top Layer w0.8: 45.11,24.5 P4.2
VCC: D1.2 F1.2 J1.1 K1.1 K1.4 P2.1 P3.1 T1.1 T2.2 | length 123
  Top Layer w0.5: F1.2 J1.1@14.56,41.97
  Top Layer w0.6: T1.1 T1.1@4.672,30.27 ; 3.97,1.13 3.97,1.21 0.75,4.43 0.75,19.9 cw(c2,19.9) 2,21.15 3.59,21.15 ccw(c3.59,22.232) 4.672,22.232 T1.1@4.672,30.27 ; F1.2 14.554,39.785 14.554,39.09 cw(c13.614,39.09) 13.614,38.15 7.11,38.15 ccw(c7.11,37) 5.96,37 5.96,33.68 4.672,32.392 T1.1@4.672,30.27 ; 16.24,1.13 16.28,1.17 P3.1
  Top Layer w1: 3.97,1.13 16.24,1.13 25.03,1.13 26.31,2.41
  Top Layer w1.5: 26.31,2.41 26.31,6.63 29.06,9.38 ; D1.2 K1.4 29.06,9.38 ; 34.01,9.3 K1.1 ; T2.2 29.21,9.23 29.06,9.38
  Top Layer w2: J1.1@14.56,41.97 14.554,41.97 J1.1 14.554,45.04 J1.1@14.57,45.04
pads on no net: U1.1 U1.2 U1.3 U1.4 U1.17 U1.18 U1.19 U1.21 U1.22 U1.25 U1.26 U1.27 U1.34 U1.37 U1.38 U1.39 U1.40 U1.41 U1.42 U1.43 U1.45 U1.46 UP1.4 UP2.4

## Polygon pours and split planes (outlines as drawn)
no net on Top Layer "Top Layer-No Net" (solid, pour order 0): 36.7,33.47

## Other copper
Top Layer:
  region net GND: 31.75,37.65 31.75,32.9 ccw(c31.95,32.9) 31.95,32.7 35.67,32.7 ccw(c35.67,33.03) 36,33.03 36,36.2 36.65,36.85 36.65,37.45 ccw(c36.45,37.45) 36.45,37.65
  region net GND: 31.96,37.53

## Silkscreen, mask and mechanical layers (free items; w line width, h text height)
Top Overlay:
  lines w0.4: 0,1.27 ccw(c1.27,1.27) 1.27,0 2,0 48,0 48.73,0 ccw(c48.73,1.27) 50,1.27 50,2 50,48 50,48.73 ccw(c48.73,48.73) 48.73,50 48,50 2,50 1.27,50 ccw(c1.27,48.73) 0,48.73 0,48 0,2 0,1.27
Bottom Overlay:
  lines w0.2: 1.1,8.81 12.25,8.81 ; 13.04,27.77 13.05,27.77 13.05,37.77 ; 14.52,8.86 25.67,8.86 ; 40.73,20.2 40.73,31.35 ; 40.73,34.84 40.73,45.99 ; 1.1,5.567 ccw(c1.577,5.567) 1.577,5.09 11.77,5.09 ccw(c11.77,5.57) 12.25,5.57 12.25,8.14 12.25,10.688 ccw(c11.738,10.688) 11.738,11.2 1.646,11.2 ccw(c1.646,10.654) 1.1,10.654 1.1,5.567 ; 8.8,27.77 15.342,27.77 15.342,37.77 9.55,37.77 8.8,37.77 8.8,27.77 ; 14.52,5.617 ccw(c14.997,5.617) 14.997,5.14 25.19,5.14 ccw(c25.19,5.62) 25.67,5.62 25.67,8.19 25.67,10.738 ccw(c25.158,10.738) 25.158,11.25 15.066,11.25 ccw(c15.066,10.704) 14.52,10.704 14.52,5.617 ; 38.62,20.746 ccw(c39.166,20.746) 39.166,20.2 44.253,20.2 ccw(c44.253,20.677) 44.73,20.677 44.73,30.87 ccw(c44.25,30.87) 44.25,31.35 41.68,31.35 39.132,31.35 ccw(c39.132,30.838) 38.62,30.838 38.62,20.746 ; 38.62,35.386 ccw(c39.166,35.386) 39.166,34.84 44.253,34.84 ccw(c44.253,35.317) 44.73,35.317 44.73,45.51 ccw(c44.25,45.51) 44.25,45.99 41.68,45.99 39.132,45.99 ccw(c39.132,45.478) 38.62,45.478 38.62,35.386
  text "OPEN SOURCE" at 34.82,44.06 h1.5
  text "3V3" at 44.18,43.82 h0.8
  text "PROGRAM" at 40.05,43.414 h0.9 r90
  text "Rx" at 44.18,41.28 h0.8
  text "Tx" at 44.18,38.74 h0.8
  text "GND" at 44.18,36.2 h0.8
  text "GND" at 12.4,34.72 h1.1
  text "ULTRASONIC" at 40.05,30.049 h0.9 r90
  text "12V" at 12.35,29.72 h1.1
  text "GND" at 44.18,29.18 h0.8
  text "POWER PORT" at 13.72,28.421 h0.9 r270
  text "ECHO" at 44.18,26.64 h0.8
  text "TRIG" at 44.18,24.1 h0.8
  text "5V" at 44.18,21.56 h0.8
  text "RESET" at 10.226,17.601 h1.5 r270
  text "STATUS COLOR" at 23.885,9.82 h0.65
  text "COLOR TRANSITION" at 11.657,9.77 h0.65
  text "12V" at 16.78,8.16 h1 r90
  text "R" at 19.32,8.16 h1 r90
  text "G" at 21.86,8.16 h1 r90
  text "B" at 24.4,8.16 h1 r90
  text "12V" at 3.36,8.11 h1 r90
  text "R" at 5.9,8.11 h1 r90
  text "G" at 8.44,8.11 h1 r90
  text "B" at 10.98,8.11 h1 r90

## Text inside footprints (layer, text, board x,y; h text height)
K1: Bottom Overlay "NC" at 29.286,5.84 h1.5 r180; Bottom Overlay "NO" at 36.017,5.891 h1.5 r180; Bottom Overlay "COM" at 31.978,13.282 h1.5 r180